# Altium PCB FRDM-Shield3.PcbDoc (part 2 of 2)
Units mil, origin at the board's own origin, x right, y up, seen from the top; angles counter-clockwise.
Board outline 3211.75 x 2684.86 mil, 2 copper layers (Top Layer, Bottom Layer), stack 15.3 mil thick; 43 components, 78 nets, 228 pads, 12 vias.
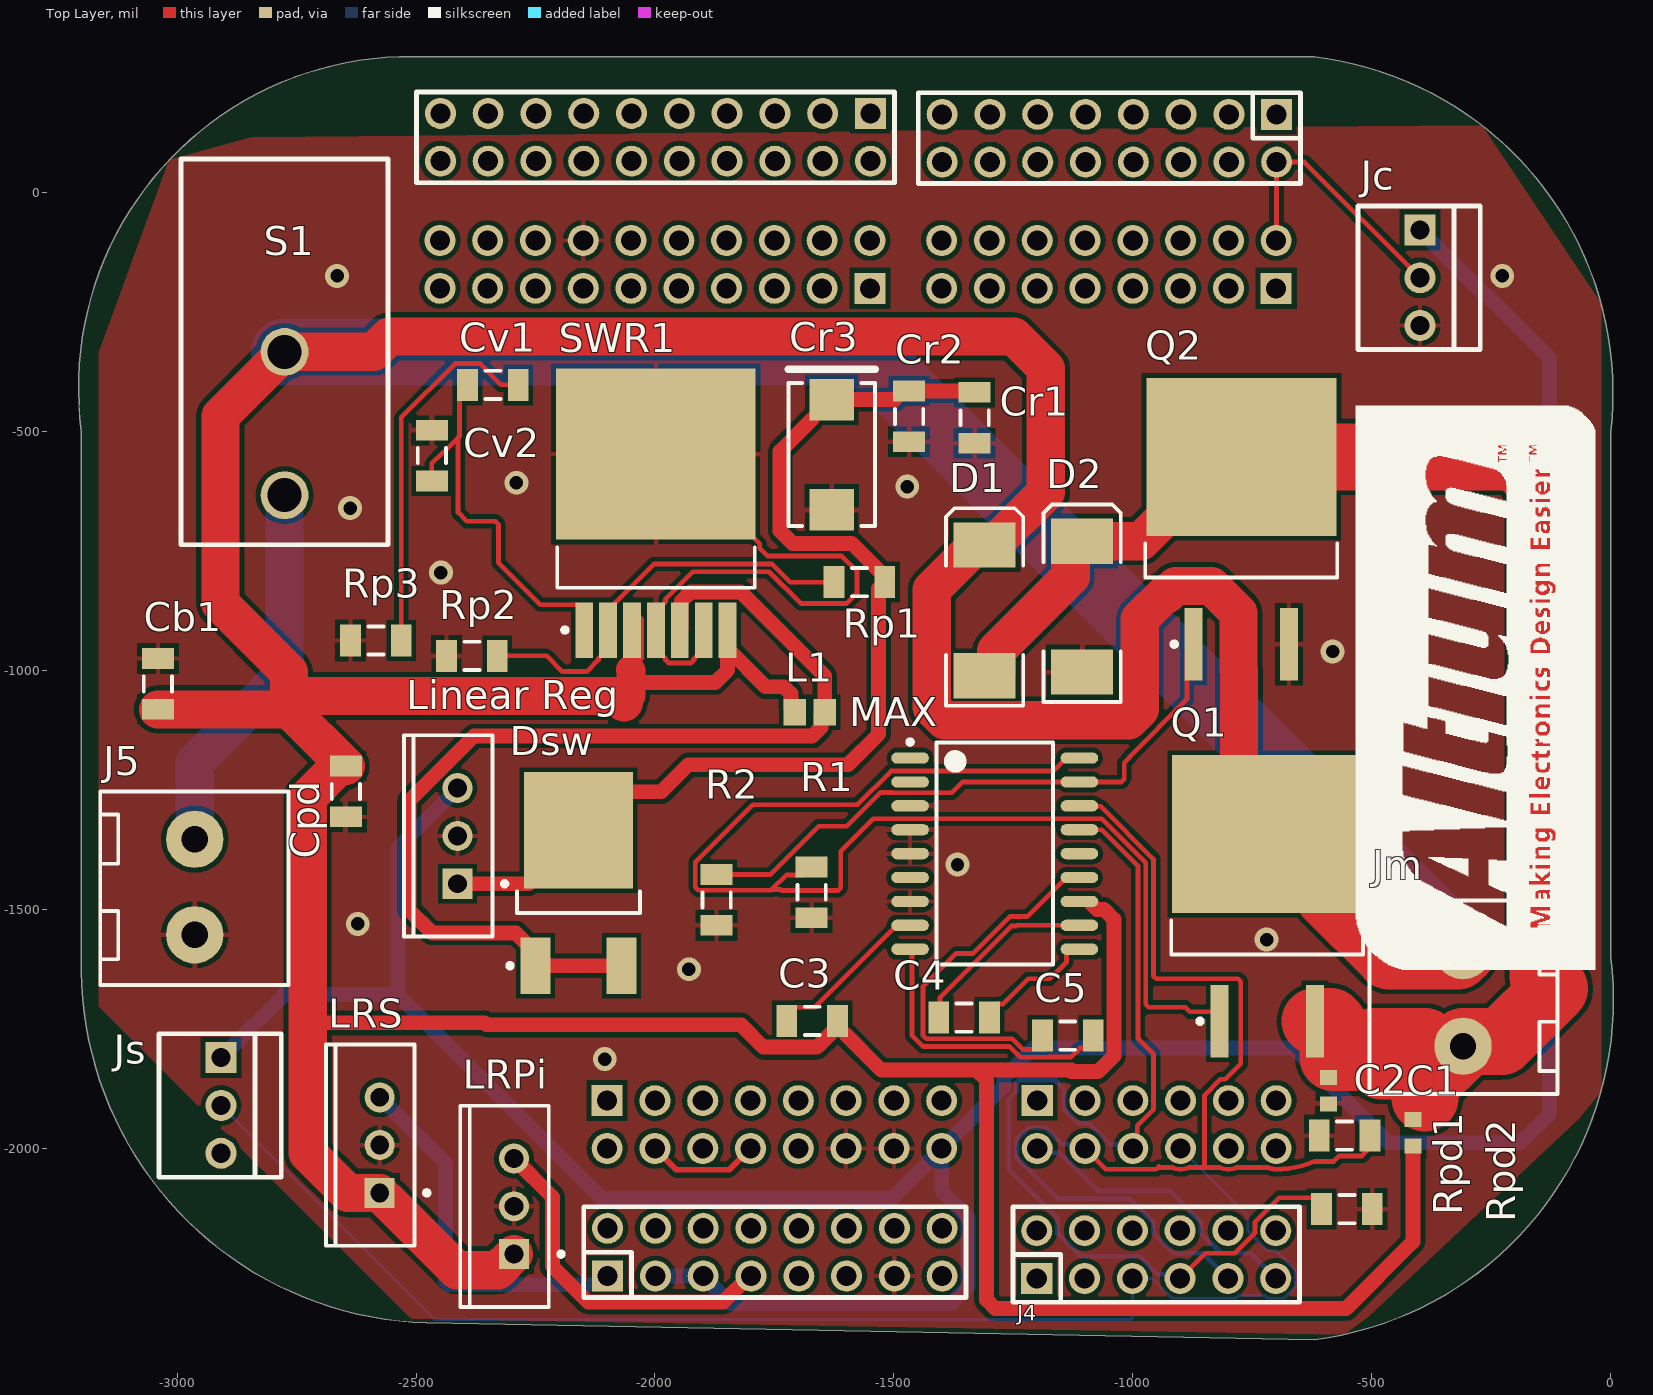
[diagram p0: Top Layer view]

## Via types
v1: diameter 50, hole 28, Top Layer to Bottom Layer, 12 vias

## Nets (pads, with @x,y where several pads share a name; then routed paths per layer and width w, separated by ;. In a path a pad name is that pad's centre, name@x,y a point inside that pad or via, vN(x,y) a via of type N, cw(c..) or ccw(c..) an arc to the next point about the centre after c; other vN are vias at no path point) (continued)
NetLabel17: C4.1 MAX.11 | length 389
  Top Layer w10: C4.1@-1422.39,-1702.39 -1408.25,-1702.39 -1403.39,-1697.54 -1403.39,-1683.39 -1254.61,-1534.61 -1244.61,-1534.61 -1243,-1533 MAX.11
NetLabel20: MAX.6
NetLabel21: C5.2 MAX.9 | length 597.5
  Top Layer w10: MAX.9 -1462,-1587.17 -1462,-1764 -1443,-1783 -1442.45,-1783 -1438.99,-1786.46 -1267.01,-1786.46 -1266.92,-1786.37 -1258.63,-1786.37 -1236,-1809 -1176.52,-1809 -1176.02,-1808.5 -1129,-1808.5 -1110.5,-1790 C5.2@-1073.85,-1790
NetRp1_1: Rp1.1 Rp2.2 SWR1.2 | length 876.9
  Top Layer w10: Rp2.2 -2226.55,-969 -2193.55,-1002 -2142.58,-1002 -2118.3,-977.72 -2118.3,-974.76 -2098,-954.46 SWR1.2 -2084.3,-901.39 -2084.3,-859.07 -2002.23,-777 -1754.75,-777 -1716.75,-815 Rp1.1
P5V_USB: J9.10
PiPSU: J7.7 LRPi.3 | length 742.2
  Top Layer w10: LRPi.3@-2295,-2032.52 LRPi.3
  Top Layer w31: LRPi.3 -2214.64,-2101.36 -2214.64,-2246.76 -2140.41,-2321 -1856.72,-2321 -1802.72,-2267 J7.7
  Bottom Layer w10: J7.7@-1801.86,-2269.86 J7.7@-1799,-2269.86
PSU1: "Linear Reg.3" J7.3 J7.5 J9.16 Jc.1 Js.1 | length 6727.3
  Top Layer w10: J7.3 J7.3@-1999,-2263.82 ; J7.5 J7.5@-1889.98,-2276.02
  Bottom Layer w31: Js.1 -2776,-1678 -2538,-1678 ; -2413,-1246 -2538,-1371 -2538,-1678 ; J7.3 J7.5 -1841,-2325 -1380.63,-2325 -1345,-2289.37 -1345,-2144.63 -1400,-2089.63 J9.16 ; Jc.1 -262,-215 -259,-215 -128,-346 -128,-1927 -189,-1988 -465,-1988 -663,-1790 -1208.03,-1790 -1270,-1851.97 -1270,-1870 J9.16 ; -2538,-1678 -2111.23,-2104.77 -1504.77,-2104.77 J9.16
PTA1: J1.2 J3.2 Jc.2 | length 564.7
  Top Layer w10: J1.2 -699.5,-99.5 -699.5,63.5 J3.2 -641,64 Jc.2
PTA2: J1.4
PTA4: J1.10
PTA5: J1.12
PTA12: J1.8
PTA13: J2.2
PTA16: J2.9
PTA17: J2.11
PTB0: J4.11 J10.2 | length 625.2
  Bottom Layer w10: J10.2 -1190.98,-2009.02 -1152.5,-2009.02 -1072.77,-2088.75 -922.73,-2088.75 -857.5,-2153.98 -857.5,-2177.02 -815.27,-2219.25 -753.75,-2219.25 J4.11
PTB1: J4.9 J10.4 MAX.16 Rpd1.1 | length 2476.6
  Top Layer w10: MAX.16 -1110.87,-1283.96 -1067.32,-1283.96 -957,-1394.29 -957,-1639.14 -951.14,-1645 -779.86,-1645 -774,-1650.86 -774,-1822.66 -806.59,-1855.25 -816.77,-1855.25 -850,-1888.48 -850,-2040 ; J10.4 -1056.5,-2043.5 -950.86,-2043.5 -945,-2037.64 ; -947.36,-2040 -917.1,-2040 ccw(c-900,-2000) -882.9,-2040 -850,-2040 ; Rpd1.1@-503.85,-1987 -503.85,-1998.81 -520.5,-2015.46 -567.94,-2015.46 -579.48,-2027 -619.41,-2027 cw(c-700,-1838.43) -700,-2043.5 cw(c-700,-2000) -717.1,-2040 -782.9,-2040 cw(c-800,-2000) -817.1,-2040 -850,-2040
  Bottom Layer w10: J10.4 -1109.02,-1990.98 -1147.5,-1990.98 -1181.98,-1956.5 -1218.02,-1956.5 -1243.5,-1981.98 -1243.5,-2018.02 -1156.77,-2104.75 -1006.73,-2104.75 -957.5,-2153.98 -957.5,-2177.02 -915.27,-2219.25 -853.75,-2219.25 J4.9
PTB2: J4.7 J10.6 MAX.15 Rpd2.2 | length 2175.4
  Top Layer w6: J4.7@-912.29,-2260.71 J4.7
  Top Layer w10: MAX.15 -1065,-1333 -989,-1409 -989,-1770 -957,-1802 -957,-1848 -956.5,-1848.5 -956.5,-1918.02 -990.98,-1952.5 -990.98,-1990.98 J10.6 ; J4.7 -848.25,-2219.25 -786.73,-2219.25 -744.5,-2177.02 -744.5,-2153.98 -693.52,-2103 -621.8,-2103 -605.15,-2119.65 Rpd2.2
  Bottom Layer w10: J10.6 -1009.02,-1990.98 -1047.5,-1990.98 -1091.23,-1947.25 -1114.27,-1947.25 -1143.5,-1918.02 -1143.5,-1875.94 -1162.94,-1856.5 -1237.06,-1856.5 -1243.5,-1862.94 -1243.5,-1880.98 -1259.5,-1896.98 -1259.5,-2044.5 -1157.5,-2146.5 -1157.5,-2177.02 -1108.77,-2225.75 -985.73,-2225.75 -948.5,-2262.98 -910.02,-2262.98 J4.7
PTB3: J4.5 J10.8 Js.2 | length 2949.4
  Top Layer w6: J4.5 J4.5@-1000.5,-2272.5
  Bottom Layer w6: Js.2 -2460,-2358 -1004.33,-2358 -1000.81,-2354.49 -1000.81,-2272.19 -959.5,-2272.19 -918.19,-2313.5 -783.81,-2313.5 -778.16,-2307.84 -723.84,-2307.84 -718.19,-2313.5 -683.81,-2313.5 -659.5,-2289.19 -659.5,-2254.81 -700.81,-2213.5 -718.19,-2213.5 -759.5,-2172.19 -759.5,-2140.5 J10.8
PTB8: J9.1
PTB9: J9.3
PTB10: J9.5
PTB11: J9.7
PTC0: J1.3
PTC1: J10.12
PTC2: J10.10
PTC3: J1.5
PTC4: J1.7
PTC5: J1.9
PTC6: J1.11
PTC7: J1.1
PTC8: J1.14
PTC9: J1.16
PTC10: J1.13
PTC11: J1.15
PTC12: J2.1
PTC13: J2.3
PTC16: J2.5
PTC17: J2.7
PTD0: J2.6
PTD1: J2.12
PTD2: J2.8
PTD3: J2.10
PTD4: J1.6
PTD5: J2.4
PTD6: J2.17
PTD7: J2.19
PTE0: J2.18
PTE1: J2.20
PTE2: J9.9
PTE3: J9.11
PTE4: J9.13
PTE5: J9.15
PTE20: J10.1
PTE21: J10.3
PTE22: J10.5
PTE23: J10.7
PTE29: J10.9
PTE30: J10.11
PTE31: J2.13
RESET/PTA20: J9.6
SDA_PTD5: J9.2
ServoPSU: J7.1 LRS.3 | length 792.2
  Bottom Layer w10: -2438,-2279.14 -2432.14,-2285 ; J7.1@-2117,-2285 J7.1
  Bottom Layer w31: LRS.3 -2438,-2031 -2438,-2279.14 ; -2432.14,-2285 J7.1@-2117,-2285
T1: MAX.18 Q1.1 R1.2 | length 2608.5
  Top Layer w10: R1.2 -1688.65,-1427.5 -1724.61,-1427.5 -1755.11,-1458 ; MAX.18 -1139.39,-1183 -1166.58,-1210.19 -1505.82,-1210.19 -1576.26,-1280.64 -1795.46,-1280.64 -1915.46,-1400.64 -1915.46,-1453.06 -1909.02,-1459.5 -1756.61,-1459.5 -1755.11,-1458 ; Q1.1 -819,-1727.68 -832.7,-1713.98 -881.04,-1713.98 -890.7,-1704.31 -967.14,-1704.31 -973,-1698.46 -973,-1402.37 -1065.18,-1310.19 -1543.19,-1310.19 -1611,-1378 -1611,-1454.14 -1616.86,-1460 -1735,-1460 -1737,-1458 -1755.11,-1458
T2: MAX.17 Q2.1 R2.2 | length 1278.9
  Top Layer w10: R2.2 -1758.67,-1426.85 -1657.52,-1325.69 -1598.69,-1325.69 -1527.91,-1254.91 -1504.08,-1254.91 -1503.17,-1255.81 -1379.16,-1255.81 -1356.35,-1233 MAX.17 -1023.86,-1233 -1018,-1227.14 -1018,-1193 -1006.82,-1181.82 -1006.82,-1180.09 -886.7,-1059.97 -886.7,-958.43 Q2.1
VREFH: J2.16
pads on no net: J2.15 J3.1 J3.3 J3.4 J3.5 J3.6 J3.7 J3.8 J3.9 J3.10 J3.11 J3.12 J3.13 J3.14 J3.15 J3.16 J4.1 J4.2 J4.3 J4.4 J4.6 J4.8 J4.10 J4.12 J6.1 J6.2 J6.3 J6.4 J6.5 J6.6 J6.7 J6.8 J6.9 J6.10 J6.11 J6.12 J6.13 J6.14 J6.15 J6.16 J6.17 J6.18 J6.19 J6.20 J7.2 J7.4 J7.6 J7.8 J7.9 J7.10 J7.11 J7.12 J7.14 J7.15 J7.16 MAX.1 MAX.2 MAX.14

## Polygon pours and split planes (outlines as drawn)
GND on Top Layer "GND_L01_P004" (solid, pour order 4): -270.08,141.38 -2845,116 -3016.31,68.48 -3164,-335 -3164,-1702 -2513,-2353 -2510,-2353 -2510,-2356 -558.41,-2389.41 -508,-2353 -67,-1938 -20.09,-1880.2 -20.09,-232.3
no net on Top Layer "NONET_L01_P002" (solid, pour order 2): -2948,-160
no net on Top Layer "NONET_L01_P001" (solid, pour order 1): -2967,-85
GND on Bottom Layer "GND_L02_P006" (solid, pour order 6): -2977,53 -2937,13 -202,13 -202,-1199 -1373,-2370 -1392,-2351 -2558,-2351 -3020,-1889 -3064,-1889

## Silkscreen, mask and mechanical layers (free items; w line width, h text height)
Top Overlay:
  drawing of 1840 lines, arcs and shapes, not listed